# Altium PCB plp-cbot_2a_assm.PcbDoc
Units mm, origin at the board's own origin, x right, y up, seen from the top; angles counter-clockwise.
Board outline 42 x 42 mm, 2 copper layers (Top Layer, Bottom Layer), stack 1.07 mm thick; 52 components, 35 nets, 168 pads, 49 vias.
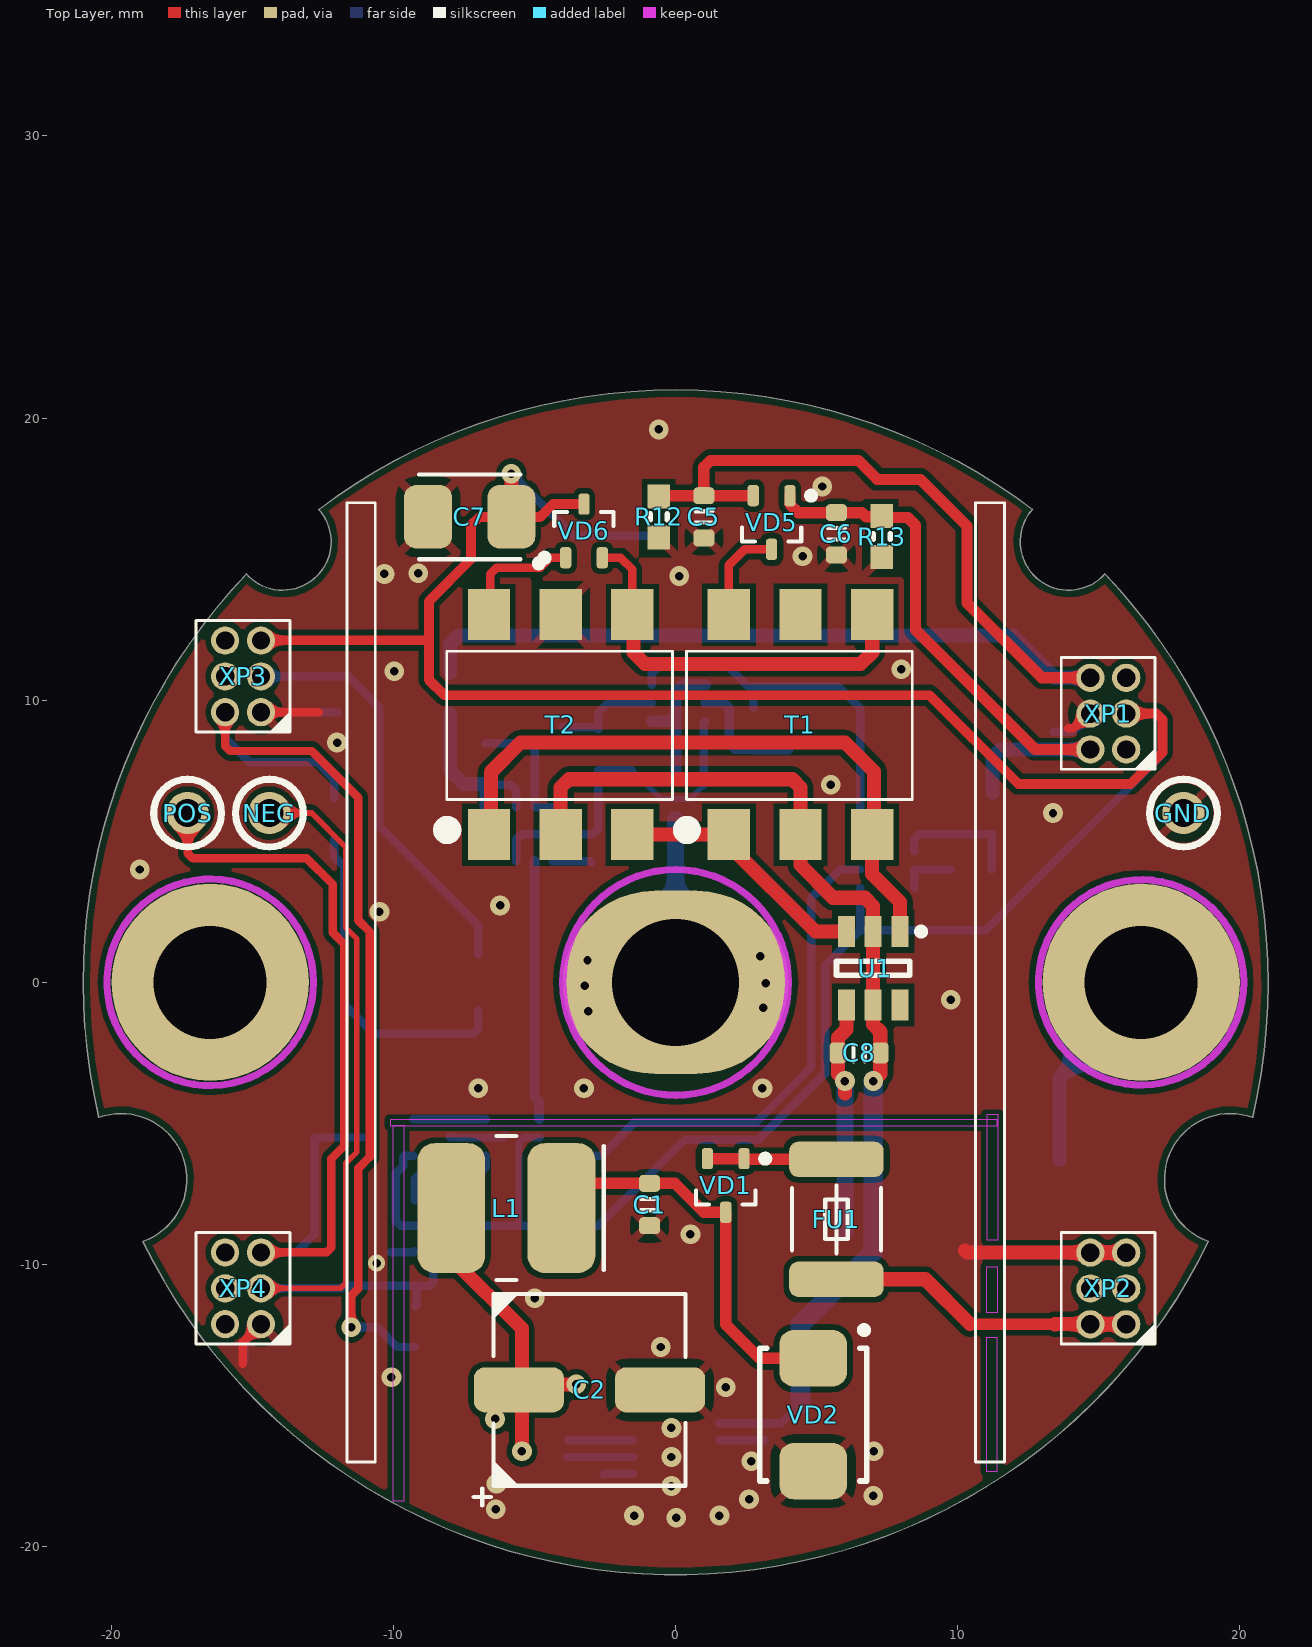
[diagram p0: Top Layer view]
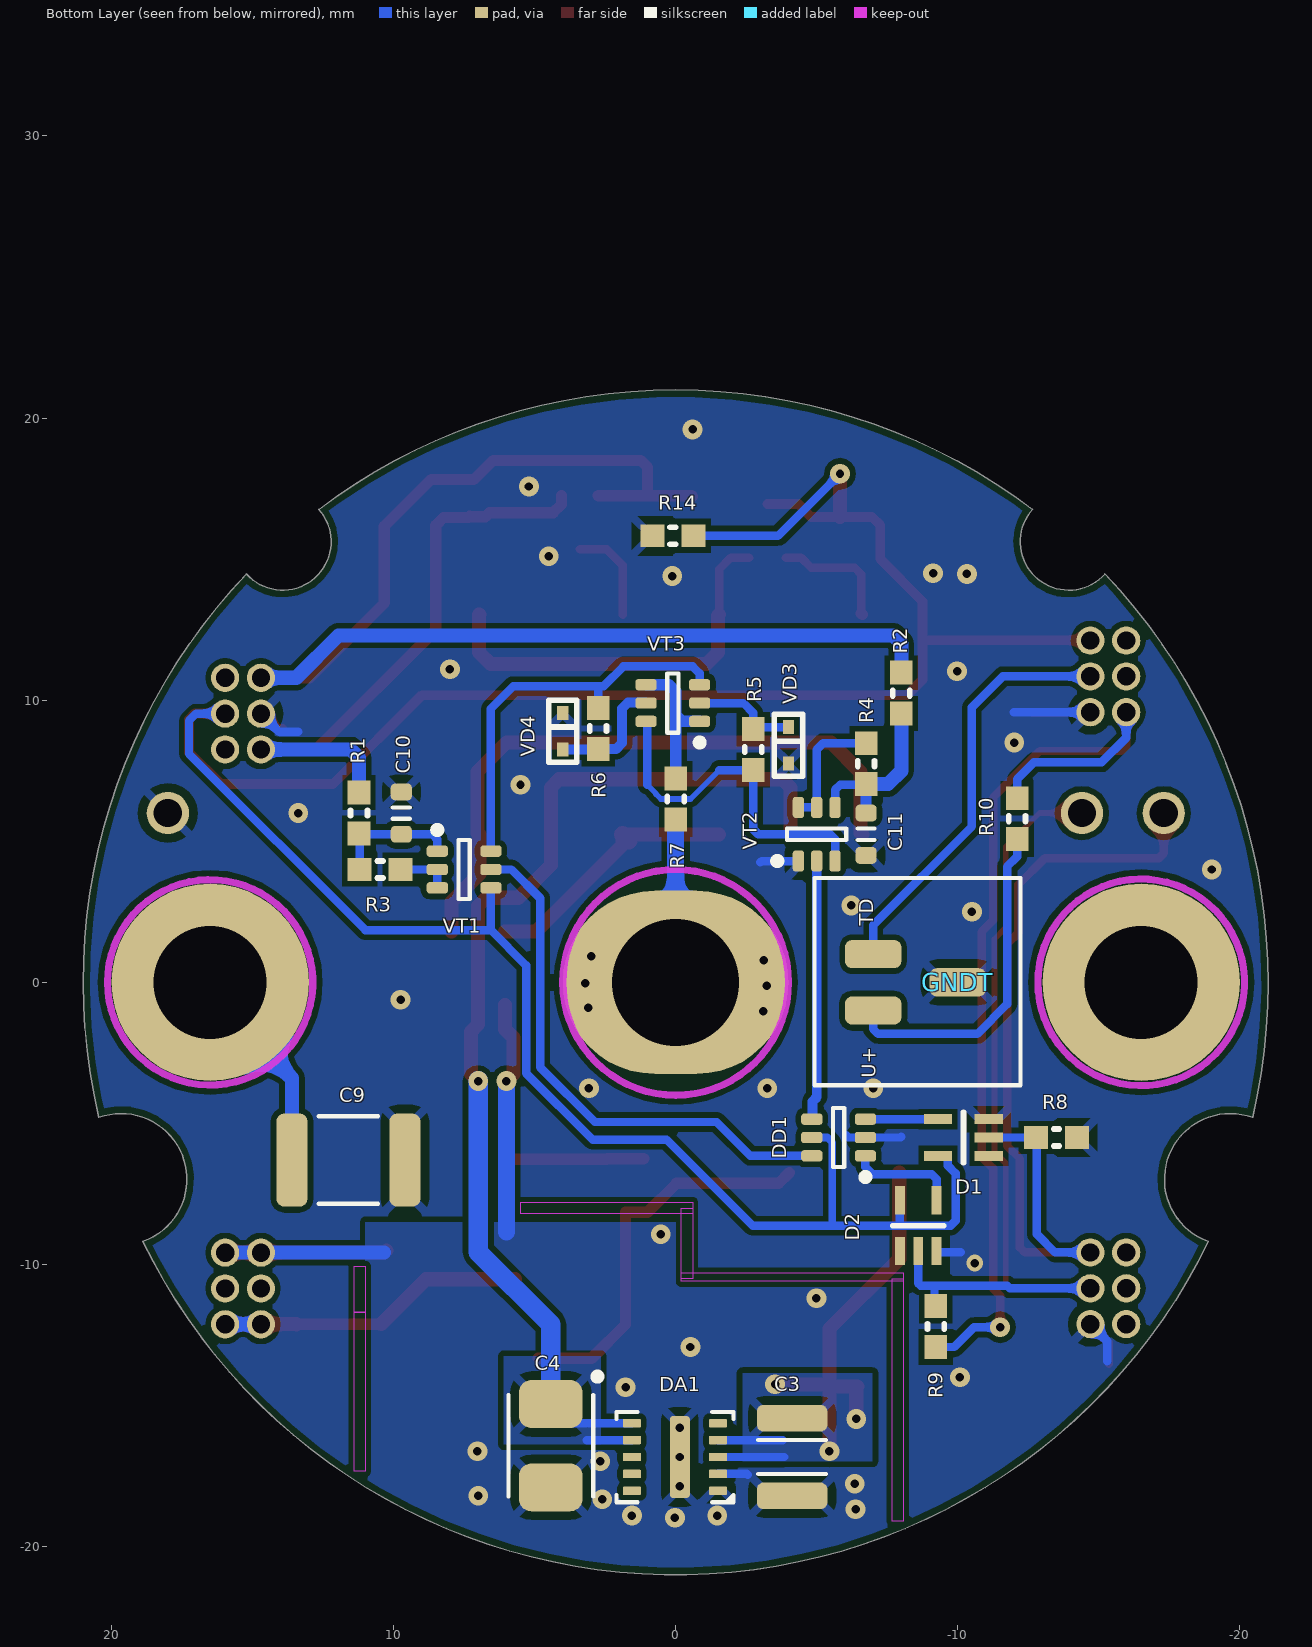
[diagram p1: Bottom Layer view, seen from below]
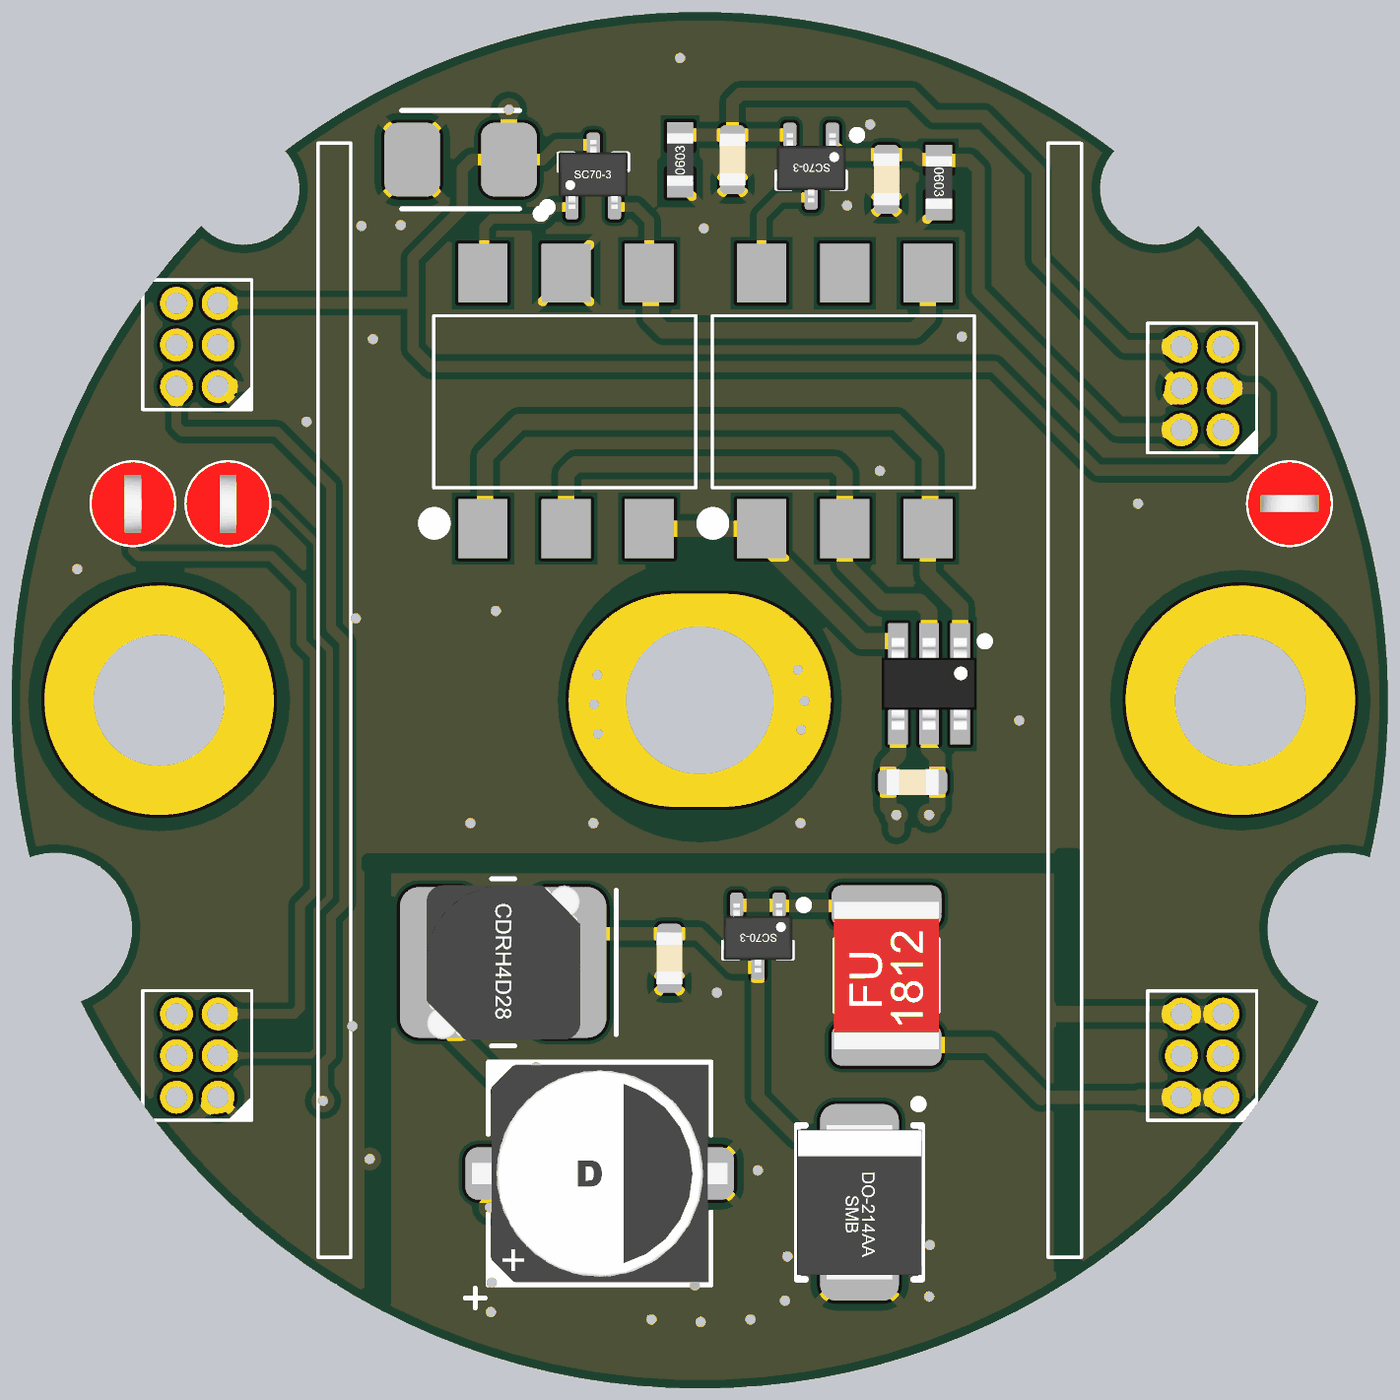
[diagram p2: 3D render of the assembled board from above, using the file's embedded part models]
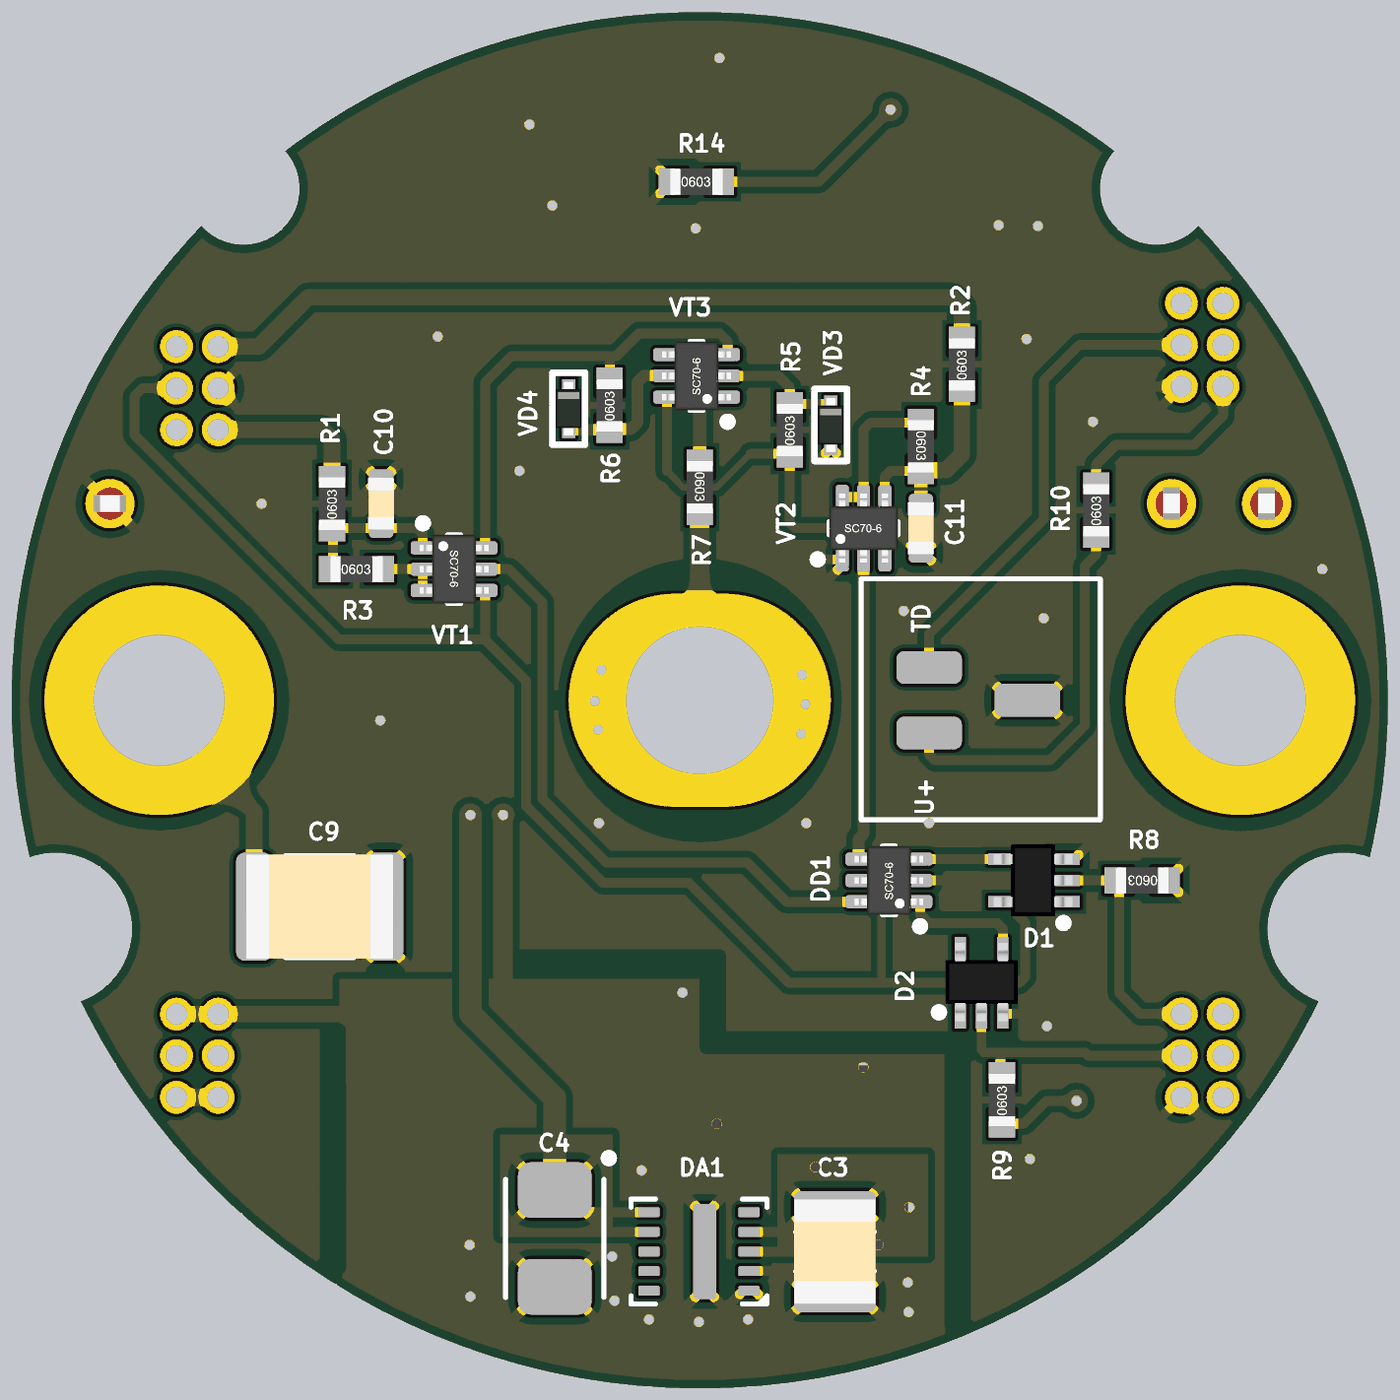
[diagram p3: 3D render of the assembled board from below, using the file's embedded part models]

## Layer stack, top to bottom
Top Solder: solder mask 0.0102, Solder Resist, Dk 3.5
Top Layer: signal copper 0.035
Dielectric1: core 1, FR-4, Dk 4.8
Bottom Layer: signal copper 0.035
Bottom Solder: solder mask 0.0102, Solder Resist, Dk 3.5

## Board outline
-18.871,-9.18 ccw(c-19.659,-6.984) -20.447,-4.788 cw(c0,0) -15.214,14.475 ccw(c-13.932,15.619) -12.649,16.762 -12.65,16.763 cw(c0,0) 12.65,16.763 ccw(c13.932,15.619) 15.204,14.464 15.215,14.474 cw(c0,0) 20.447,-4.788 ccw(c19.659,-6.984) 18.878,-9.183 18.884,-9.186 cw(c0,0)

## Design rules (kind name [scope] priority, off if disabled: settings)
AcuteAngle [All] p1: minimum=4.40000000000000E+0001 checktracksonly=FALSE
BoardOutlineClearance [All] p1: gap=0.254 ignorepadtopadclearanceinfootprint=FALSE except(0: Arc-SplitContinuation Track-SplitContinuation SMDPad-SplitContinuation THPad-SplitContinuation Via-SplitContinuation Fill-SplitContinuation Poly-SplitContinuation Region-SplitContinuation Text-SplitContinuation)
Clearance Clearance_in [(OnLayer('MidLayer1') OR OnLayer('MidLayer2'))] p1: gap=0.2 ignorepadtopadclearanceinfootprint=FALSE except(0: Arc-Hole Track-Hole SMDPad-Hole THPad-Hole Via-Hole Fill-Hole Poly-Hole Region-Hole Text-Hole)
Clearance Clearance_Bound [Not (OnBottomLayer Or OnTopLayer) vs IsBoardCutoutRegion Or IsBoardOutline] p2 off: gap=0.5 ignorepadtopadclearanceinfootprint=FALSE except(0: Arc-Hole Track-Hole SMDPad-Hole THPad-Hole Via-Hole Fill-Hole Poly-Hole Region-Hole Text-Hole)
Clearance Clearance_Poly [InNet('PE')] p3 off: gap=0.5 ignorepadtopadclearanceinfootprint=FALSE except(0: Arc-Hole Track-Hole SMDPad-Hole THPad-Hole Via-Hole Fill-Hole Poly-Hole Region-Hole Text-Hole)
Clearance Clearance_Poly_1 [InNet('-Uп') vs InNet('GND')] p4 off: gap=0.5 ignorepadtopadclearanceinfootprint=FALSE except(0: Arc-Hole Track-Hole SMDPad-Hole THPad-Hole Via-Hole Fill-Hole Poly-Hole Region-Hole Text-Hole)
Clearance Clearance_Poly_2 [InNet('NetC4_1') vs InNet('GND')] p5 off: gap=0.5 ignorepadtopadclearanceinfootprint=FALSE except(0: Arc-Hole Track-Hole SMDPad-Hole THPad-Hole Via-Hole Fill-Hole Poly-Hole Region-Hole Text-Hole)
Clearance Clearance_Poly_3 [InNet('OUT')] p6 off: gap=0.5 ignorepadtopadclearanceinfootprint=FALSE except(0: Arc-Hole Track-Hole SMDPad-Hole THPad-Hole Via-Hole Fill-Hole Poly-Hole Region-Hole Text-Hole)
Clearance Clearance_out [(OnLayer('Bottom Layer') OR OnLayer('Top Layer'))] p7: gap=0.2 ignorepadtopadclearanceinfootprint=FALSE except(0: Arc-Hole Track-Hole SMDPad-Hole THPad-Hole Via-Hole Fill-Hole Poly-Hole Region-Hole Text-Hole)
HoleSize [All] p1: absolutevalues=TRUE maxlimit=2.54 minlimit=0.3 maxpercent=80.000 minpercent=20.000
MinimumAnnularRing [All] p1: minimumring=0.2
MinimumSolderMaskSliver [All] p1: minsoldermaskwidth=0
NetAntennae [All] p1: netantennaetolerance=5
PermittedLayers [All] p1: toplayerpermitted=TRUE bottomlayerpermitted=TRUE
PlaneClearance [All] p1: clearance=0.2
PolygonConnect [All] p1: thpad.connectstyle=Relief thpad.reliefconductorwidth=0.3 thpad.reliefentries=2 thpad.polygonreliefangle="135 Angle" thpad.airgapwidth=0.3 smdpad.connectstyle=Relief smdpad.reliefconductorwidth=0.3 smdpad.reliefentries=4 smdpad.polygonreliefangle="45 Angle" smdpad.airgapwidth=0.3 via.connectstyle=Direct via.reliefconductorwidth=0.3 via.reliefentries=2 via.polygonreliefangle="135 Angle" via.airgapwidth=0.3
PolygonConnect PolygonConnect_1 [InComponent('XS3','XS4','XS5')] p2: thpad.connectstyle=Relief thpad.reliefconductorwidth=0.3 thpad.reliefentries=2 thpad.polygonreliefangle="135 Angle" thpad.airgapwidth=0.3 smdpad.connectstyle=Relief smdpad.reliefconductorwidth=0.3 smdpad.reliefentries=4 smdpad.polygonreliefangle="45 Angle" smdpad.airgapwidth=0.3 via.connectstyle=Direct via.reliefconductorwidth=0.3 via.reliefentries=2 via.polygonreliefangle="135 Angle" via.airgapwidth=0.3
PolygonConnect PolygonConnect_via [isvia] p3: connectstyle=Direct reliefconductorwidth=0.254 reliefentries=4 polygonreliefangle="90 Angle" airgapwidth=0.254
RoutingVias [All] p1: holewidth=0.3 width=0.8 viastyle="Through Hole" minholewidth=0.2 minwidth=0.6 maxholewidth=0.4 maxwidth=1.27
SMDNeckDown [All] p1: percent=100.000
SMDToCorner [All] p1: distance=59055
SMDToPlane [All] p1: distance=0
ShortCircuit [All] p1: allowed=TRUE
SilkToSilkClearance [All] p1: silktosilkclearance=0.15
SilkToSolderMaskClearance SilkscreenOverComponentPads [IsPad] p1: minsilkscreentomaskgap=0.15 clearancetoexposedcopper=TRUE
SolderMaskExpansion [All] p1: expansion=0.1 istentingtop=FALSE
ViasUnderSMD [All] p1: allowed=TRUE
Width [All] p1: maxlimit=3 minlimit=0.2 preferedwidth=0.25 minimp=50.000000 maximp=50.000000 favimp=50.000000
23 further rules are at their usual default settings.

## Components (designator, comment, footprint, x,y, rotation, side; value= is the part's Value field where it differs from the comment)
+U "smd_pin" smd_pin#1 -8.275,-1.7 r180 bottom locked
C1 "4,7uF" CAPC_0603(1608)X080L -0.925,-7.875 r90 top
C2 "47uF" CAPSM_D_M7878X54L -3.054,-14.445 r0 top
C3 "CAPC_1210(3225)X10" CAPC_1210(3225)X10L -4.125,-16.825 r90 bottom value=10mkF
C4 "" CAP_B3528X21N 4.425,-16.425 r270 bottom
C5 "4,7uF" CAPC_0603(1608)X080L 1,16.5 r90 top
C6 "4,7uF" CAPC_0603(1608)X080L 5.7,15.9 r270 top
C7 "100uF" CAP_B3528X21N -7.3,16.5 r180 top
C8 "10uF" CAPC_0603(1608)X080L 6.5,-2.5 r0 top
C9 "0.001uF" CAPC_1812(4532)X16L 11.6,-6.3 r0 bottom
C10 "1uF" CAPC_0603(1608)X080L 9.725,6 r90 bottom
C11 "1uF" CAPC_0603(1608)X080L -6.75,5.25 r90 bottom
D1 "SN74LV1T34DCK" SC70-5 -10.2,-5.5 r0 bottom
D2 "SN74LV1T34DCK" SC70-5 -8.6,-8.625 r90 bottom
DA1 "LMZM23600" MicroSIP 0.025,-16.825 r90 bottom
DD1 "NC7WZ17P6X" SC-70-6 -5.775,-5.5 r90 bottom
FU1 "MF-MSMF" FU4532(1812)X06N 5.7,-8.4 r90 top
GND "Testpoint_HS1mm" TestPoint(1mm_HS) 18.088,5.914 r0 top
GNDT "smd_pin" smd_pin#2 -10,-0.025 r180 bottom locked
L1 "CDRH4D28" CDRH4D28_INDP5050X28N -6,-8 r270 top value=22uH
NEG "Testpoint_HS1mm" TestPoint(1mm_HS) -14.486,5.912 r270 top
POS "Testpoint_HS1mm" TestPoint(1mm_HS) -17.386,5.912 r270 top
R1 "1k" RESC1608(0603)X04L 11.225,6 r90 bottom
R2 "1k" RESC1608(0603)X04L -8,10.25 r90 bottom
R3 "1k" RESC1608(0603)X04L 10.475,4 r180 bottom
R4 "1k" RESC1608(0603)X04L -6.75,7.75 r270 bottom
R5 "1k" RESC1608(0603)X04L -2.75,8.25 r90 bottom
R6 "1k" RESC1608(0603)X04L 2.75,9 r90 bottom
R7 "100" RESC1608(0603)X04L 0,6.5 r270 bottom value=1k
R8 "10k" RESC1608(0603)X04L -13.5,-5.5 r0 bottom
R9 "10k" RESC1608(0603)X04L -9.225,-12.2 r90 bottom
R10 "R0603L" RESC1608(0603)X04L -12.1,5.8 r90 bottom value=100
R12 "20K" RESC1608(0603)X04L -0.6,16.5 r90 top
R13 "20K" RESC1608(0603)X04L 7.3,15.8 r270 top
R14 "1K" RESC1608(0603)X04L 0.1,15.825 r180 bottom
T1 "B82805A" B82805A 7.2,5.2 r90 top
T2 "B82805A" B82805A -1.3,5.2 r90 top
TD "smd_pin" smd_pin#3 -8.575,2.625 r180 bottom locked
U1 "SN6505B" SOT23-6 7,0.5 r270 top
VD1 "BAV70W" SC-70 1.775,-7.2 r180 top
VD2 "SMBJ33A" SMB 4.875,-15.325 r270 top
VD3 "BZX585" "DIODE: SOD523" -4,7.75 r90 bottom
VD4 "BZX585" "DIODE: SOD523" 4,8.25 r90 bottom
VD5 "BAT54SW" SC-70 3.4,16.3 r180 top
VD6 "BAT54CW" SC-70 -3.25,16 r0 top
VT1 "NX3008CBKS" SC-70-6 7.5,4 r270 bottom
VT2 "NX3008CBKS" SC-70-6 -5,5.25 r180 bottom
VT3 "NX3008CBKS" SC-70-6 0.1,9.9 r90 bottom
XP1 "2199R05-06G-301523" "CON: PLL-6(2x3R1.27female)" 17.012,7.501 r90 top locked
XP2 "2199R05-06G-301523" "CON: PLL-6(2x3R1.27female)" 17.012,-12.874 r90 top locked
XP3 "2199R05-06G-301523" "CON: PLL-6(2x3R1.27female)" -13.658,8.821 r90 top locked
XP4 "2199R05-06G-301523" "CON: PLL-6(2x3R1.27female)" -13.658,-12.869 r90 top locked

## Footprints (in the part's own frame and the unit in brackets; to place one, negate y for a bottom-side part, rotate by r counter-clockwise, add the part's x,y. Pads: shape width x height; smd on the part's side, far side on the other; paste and mask are expansions set on the pad)
B82805A [mm]
  rect 1.8x1.5 smd: 1(0.036,5.317) 2(0.036,2.777) 3(0.036,0.237) 4(7.836,0.237) 5(7.836,2.777) 6(7.836,5.317)
  silkscreen extent -0.05,-1.18 6.54,7.05, body extent 1.29,-1.18 6.54,6.82, height 5.7
CAP_B3528X21N [mm] "Molded Capacitor, 2-Leads, Body 3,5x2,8mm, IPC Medium Density"
  rrect50% 1.7x2.25 smd: 1(-1.475,0) 2(1.475,0)
  silkscreen extent -2.57,-1.5 1.8,1.77, body extent -1.8,-1.45 1.8,1.45, height 1.9
CAPC_0603(1608)X080L [mm] "Chip Capacitor, 2-Leads, Body 1,6x0,8mm, IPC High Density"
  rrect50% 0.6x0.75 smd: 1(-0.75,0) 2(0.75,0)
  silkscreen extent -0.2,-0.3 0.2,0.3, body extent -0.8,-0.4 0.8,0.4, height 0.8
CAPC_1210(3225)X10L [mm] "Chip Capacitor, 2-Leads, Body 3,2x2,5mm, IPC High Density"
  rrect50% 0.95x2.5 smd: 1(-1.375,0) 2(1.375,0)
  silkscreen extent -0.6,-1.2 0.6,1.2, body extent -1.6,-1.25 1.6,1.25, height 0.94
CAPC_1812(4532)X16L [mm] "Chip Capacitor, 2-Leads, Body 4,5x3,2mm, IPC High Density"
  rrect50% 1.1x3.3 smd: 1(-2,0) 2(2,0)
  silkscreen extent -1.05,-1.55 1.05,1.55, body extent -2.25,-1.6 2.25,1.6, height 1.52
CAPSM_D_M7878X54L [mm] "Molded Capacitor, 2-Leads, Body 7,8x7,8mm, IPC High Density"
  rrect50% 3.2x1.6 smd: 1(-2.5,0) 2(2.5,0)
  silkscreen extent -4.1,-4.1 3.4,3.4, body extent -3.9,-3.3 3.9,3.3, height 5.57
CDRH4D28_INDP5050X28N [mm] "Precision Wire Wound Inductor, 2-Leads, Body 5,0x5,0mm, IPC Medium Density"
  rrect50% 4.6x2.4 smd: 1(0,1.95) 2(0,-1.95)
  silkscreen extent -2.55,-0.35 2.55,3.45, body extent -2.35,-2.35 2.35,2.37, height 2.8
"CON: PLL-6(2x3R1.27female)" [mm]
  round 1 hole 0.65: 1(0.754,1.042) 2(0.754,2.312) 3(2.024,1.042) 4(2.024,2.312) 5(3.294,1.042) 6(3.294,2.312)
  silkscreen extent 0.05,0.02 4.01,3.34
"DIODE: SOD523" [mm]
  rect 0.5x0.4 smd: 1(0,0) 2(1.3,0)
  silkscreen extent -0.45,-0.5 1.75,0.5, body extent -0.17,-0.4 1.48,0.4, height 0.65
FU4532(1812)X06N [mm] "Chip Resistor, 2-Leads, Body 4,5x3,2mm, IPC Medium Density"
  rrect50% 1.25x3.35 smd: 1(-2.125,0) 2(2.125,0)
  silkscreen extent -1.2,-1.58 1.2,1.58, body extent -2.25,-1.6 2.25,1.6, height 0.6
MicroSIP [mm]
  rrect30% 0.3x0.65 smd: 1(-1.2,-1.525) 2(-0.6,-1.525) 3(0,-1.525) 4(0.6,-1.525) 5(1.2,-1.525) 6(1.2,1.525) 7(0.6,1.525) 8(0,1.525) 9(-0.6,1.525) 10(-1.2,1.525)
  rrect30% 2.9x0.7 smd: 11(0,-0.175)
  silkscreen extent -1.6,-2.07 1.6,2.08, body extent -1.5,-1.9 1.5,1.9, height 1.6
RESC1608(0603)X04L [mm] "Chip Resistor, 2-Leads, Body 1,6x0,8mm, IPC High Density"
  rect 0.85x0.8 smd: 1(-0.725,0) 2(0.725,0)
  silkscreen extent -0.1,-0.3 0.1,0.3, body extent -0.8,-0.4 0.8,0.4, height 0.45
SC70-5 [mm] "pitch 0.95 mm"
  rect 1x0.35 smd: 1(-0.9,0.65) 2(-0.9,0) 3(-0.9,-0.65) 4(0.9,-0.65) 5(0.9,0.65)
  round 0.5 on Bottom Overlay: ""(-0.9,1.3)
  round 0.5 on Mech15: ""(-0.775,0.725)
  silkscreen extent 0,-0.9 0,0.9, body extent -1.18,-1.1 1.22,1.1, height 1.09
SC-70 [mm] "SC-70, 3-Leads, Body 2,1x1,4mm (max), Pitch 0,65mm, IPC High Density"
  rrect50% 0.4x0.75 smd: 1(-0.65,-0.95) 2(0.65,-0.95) 3(0,0.95)
  silkscreen extent -1.53,-1.07 1.05,0.67, body extent -1.05,-1 1.05,1.1, height 1.1
SC-70-6 [mm] "SC-70, 6-Leads, Body 2,1x1,4mm (max), Pitch 0,65mm, IPC High Density"
  rrect50% 0.4x0.75 smd: 1(-0.65,-0.95) 2(0,-0.95) 3(0.65,-0.95) 4(0.65,0.95) 5(0,0.95) 6(-0.65,0.95)
  silkscreen extent -1.52,-1.07 1.05,0.2, body extent -1.05,-1.05 1.05,1.05, height 1.1
SMB [mm] "Molded Diode, 2-Leads, Body 4,4x3,5mm, IPC Medium Density"
  rrect50% 2x2.4 smd: 1(-2,0) 2(2,0)
  silkscreen extent -3.12,-1.9 2.35,1.92, body extent -2.35,-1.9 2.35,1.9, height 2.32
smd_pin#1 [mm]
  rrect50% 2x1 smd: 1(-1.275,0.7)
smd_pin#2 [mm]
  rrect50% 2x1 smd: 1(0,0.025)
smd_pin#3 [mm]
  rrect50% 2x1 smd: 1(-1.575,-1.625)
SOT23-6 [mm] "pitch 0.95 mm"
  rect 1.1x0.6 smd: 1(-1.3,0.95) 2(-1.3,0) 3(-1.3,-0.95) 4(1.3,-0.95) 5(1.3,0) 6(1.3,0.95)
  round 0.5 on Mech13: ""(-1,1.1)
  silkscreen extent -1.42,-1.3 0.25,1.83, body extent -1.4,-1.45 1.4,1.45, height 1.45
TestPoint(1mm_HS) [mm]
  round 1.5 hole 1: 1(-0.088,0.086)
  silkscreen extent -1.29,-1.11 1.11,1.29, body extent -1.36,-1.18 1.18,1.36, height 4.57

## Part data
C1: library part "Capacitor Ceramic", "Конденсатор", Case=0603, Manufacturer=Murata, Rated DC Voltage=50V, ReplacementPart1Manufacturer=TDK, ReplacementPart2Manufacturer="Taiyo Yuden", Temperature Range="-55 to +125°C", Tolerance=±10%, ComponentLink1Description="Global Data", ComponentLink1URL=http://www.murata.com/products/capacitor/tech_data/index.html, ComponentLink2Description="Part Data Sheet", ComponentLink3Description="Replacement Data Sheet", ComponentLink4Description="Replacement 2 Data Sheet", ESR="* mOhm", OrderCode="0603 - 0,022мкФ ±10% - 50В - X7R", TC Code=X7R
C2: library part "SMD 5.3XD6.3 ALUM 22uFx50V", "Конденсатор", CaseCode=D, CaseSize=D6.3X5.4, Manufacturer=Panasonic, Rated DC Voltage="50 V", Tolerance=±20%, OrderCode="EEE1HA220WP - 22 мкФ - 50 В", Rated T="-40 to +85°C", Series=SV
C3: "Capacitor Chip"
C4: library part "Capacitor Polarized", "Конденсатор", Manufacturer=Murata, ComponentLink1Description="Global Data", ComponentLink2Description="Part Data Sheet", ComponentLink3Description="Replacement Data Sheet", ComponentLink4Description="Replacement 2 Data Sheet", TC Code=X7R
C5 C6: library part "Capacitor Ceramic", "Конденсатор", Case=0603, Manufacturer=Murata, Rated DC Voltage=25V, ReplacementPart1Manufacturer=TDK, ReplacementPart2Manufacturer="Taiyo Yuden", Temperature Range="-55 to +125°C", Tolerance=±10%, ComponentLink1Description="Global Data", ComponentLink1URL=http://www.murata.com/products/capacitor/tech_data/index.html, ComponentLink2Description="Part Data Sheet", ComponentLink3Description="Replacement Data Sheet", ComponentLink4Description="Replacement 2 Data Sheet", ESR="* mOhm", OrderCode="0603 - 0,022мкФ ±10% - 50В - X7R", TC Code=X7R
C7: library part "Capacitor Polarized", "Конденсатор", Manufacturer=Murata, Rated DC Voltage=10V, ComponentLink1Description="Global Data", ComponentLink2Description="Part Data Sheet", ComponentLink3Description="Replacement Data Sheet", ComponentLink4Description="Replacement 2 Data Sheet", TC Code=X7R
C8: library part "Capacitor Ceramic", "Конденсатор", Case=0603, Manufacturer=Murata, ReplacementPart1Manufacturer=TDK, ReplacementPart2Manufacturer="Taiyo Yuden", Temperature Range="-55 to +125°C", Tolerance=±10%, ComponentLink1Description="Global Data", ComponentLink1URL=http://www.murata.com/products/capacitor/tech_data/index.html, ComponentLink2Description="Part Data Sheet", ComponentLink3Description="Replacement Data Sheet", ComponentLink4Description="Replacement 2 Data Sheet", ESR="* mOhm", OrderCode="0603 - 0,022мкФ ±10% - 50В - X7R", TC Code=X7R
C9: library part "Capacitor Ceramic", "Конденсатор", Case=0603, Manufacturer=Murata, PartNumber="0603 - 0,1 мкФ ± 10 % - 50 В - X7R", Rated DC Voltage=3000V, ReplacementPart1Manufacturer=TDK, ReplacementPart2Manufacturer="Taiyo Yuden", Temperature Range="-55 to +125°C", Tolerance=±10%, ComponentLink1Description="Global Data", ComponentLink1URL=http://www.murata.com/products/capacitor/tech_data/index.html, ComponentLink2Description="Part Data Sheet", ComponentLink3Description="Replacement Data Sheet", ComponentLink4Description="Replacement 2 Data Sheet", TC Code=X7R
C10 C11: library part "0603 - X7R - 16V - 1uF", "Конденсатор", Case=0603, Manufacturer=Murata, PartNumber="GRM188R71C105KA12D - 0603 - 1 мкФ ± 10 % - 16 В - X7R", Rated DC Voltage=50V, ReplacementPart1Manufacturer=TDK, ReplacementPart1PartNumber=C1608X7R1C105K, ReplacementPart2Manufacturer="Taiyo Yuden", Temperature Range="-55 to +125°C", Tolerance=±10%, ComponentLink1Description="Global Data", ComponentLink1URL=http://www.murata.com/products/capacitor/tech_data/index.html, ComponentLink2Description="Part Data Sheet", ComponentLink3Description="Replacement Data Sheet", ComponentLink4Description="Replacement 2 Data Sheet", TC Code=X7R
D1 D2: "Single Buffer", ComponentLink1Description=Datasheet, ComponentLink1URL=https://www.ti.com/lit/ds/symlink/sn74lv1t34.pdf?ts=1607003293244&ref_url=https%253A%252F%252Fwww.ti.com%252Fproduct%252FSN74LV1T34
DA1: "Микросхема", Manufacturer="Texas Instruments", ComponentLink1Description="Data Sheet (offline)", ComponentLink1URL="\\axirion\KB\PDF\Стабилизаторы напряжения импульсные\tps63001.pdf", ComponentLink2Description="Replacement 1 Data Sheet", ComponentLink3Description="Replacement 2 Data Sheet", PartNumber=LMZM23600, TopMarking=BPT
DD1: "UHS Dual Buffer with Schmitt Trigger Inputs"
FU1: "Самовостанавливающийся предохранитель", Manufacturer=Bourns, PartNumber="MF-MSMF 010/60-2", ReplacementPart1Manufacturer=Tyco-Electronics, ReplacementPart1PartNumber=MINISMDC010F-2, ComponentLink1Description="Data Sheet", ComponentLink1URL=http://www.bourns.com/data/global/pdfs/mfmsmf.pdf, ComponentLink2Description="Replacement 1 Data Sheet", ComponentLink2URL=http://www.tycoelectronics.com/catalog/bin/TE.Connect?S=23159&M=PPROP&P=152415,173314&BML=10576,17593&LG=1&PG=1&IDS=489613,489486&N=1
R1 R2 R3 R4 R5 R6 R7 R8 R9 R12 R13 R14: library part R0603L, "Резистор", Case=0603, Manufacturer=Bourns, Max Rated DC Voltage="100 В", PartNumber="0603 - {Value} Ом ± 1 %", Power="1/10 Вт", Rated DC Voltage="50 В", Temperature Range="-55 to +125°C", Tolerance="±1 %", ComponentLink1Description="Data Sheet", ComponentLink1URL=http://smd.ru/files/upload/1207/ru/chip-resis.pdf, ComponentLink2Description="Specific Res Only", ComponentLink3Description="Replacement Data Sheet", ComponentLink4Description="Replacement 2 Data Sheet", Rated T="-55 °C to +125 °C", TKR="±100 ppm"
R10: "Резистор", Case=0603, Manufacturer=Bourns, Max Rated DC Voltage="100 В", Power="1/10 Вт", Rated DC Voltage="50 В", Resistance Code="0603 {Value} Ом ±1 %", Temperature Range="-55 to +125°C", Tolerance="±1 %", ComponentLink1Description="Data Sheet", ComponentLink1URL=http://smd.ru/files/upload/1207/ru/chip-resis.pdf, ComponentLink2Description="Specific Res Only", ComponentLink3Description="Replacement Data Sheet", ComponentLink4Description="Replacement 2 Data Sheet", Rated T="-55 °C to +125 °C", TKR="±100 ppm"
T1 T2: "SMT Push-Pull Transformers", ComponentLink1Description=Datasheet, ComponentLink1URL=https://www.tdk-electronics.tdk.com/inf/30/ds/b82805a.pdf
U1: library part SN6505A, "Low-Noise 1-A Transformer Drivers for Isolated Power Supplies", ComponentLink1Description=Datasheet, ComponentLink1URL=https://www.ti.com/lit/ds/symlink/sn6505a.pdf?ts=1606984863638&ref_url=https%253A%252F%252Fwww.google.com%252F
VD1: "Сборка диодная", Manufacturer=NXP, Package=SC-70, ComponentLink1Description=DataSheet, ComponentLink2Description=Replacement1DataSheet, ComponentLink3Description=Replacement2DataSheet, PartNumber=BAV70W
VD2: "TVS Диод", Manufacturer="ST Microelectronics", ReplacementPart1Manufacturer=NXP, ReplacementPart1PartNumber=PTVS33VP1UP, ReplacementPart2Manufacturer=VISHAY, StandOffVoltage=33V, ComponentLink1Description="Data Sheet", ComponentLink1URL=http://www.st.com/internet/com/TECHNICAL_RESOURCES/TECHNICAL_LITERATURE/DATASHEET/CD00001366.pdf, ComponentLink2Description="Replacement 1 Data Sheet", ComponentLink2URL=http://www.nxp.com/documents/data_sheet/PTVSXP1UP_SER.pdf, ComponentLink3Description="Replacement 2 Data Sheet", PartNumber=SMBJ33A, ReplacementPart2TopMarking=KC
VD3 VD4: "Voltage regulator diodes", ComponentLink1Description=Datasheet, ComponentLink1URL=https://assets.nexperia.com/documents/data-sheet/BZX585_SERIES.pdf
VD5: "Сборка диодная", Manufacturer=NXP, Package=SC-70, ReplacementPart1Manufacturer="ON Semiconductor", ReplacementPart1PartNumber=BAT54SWT1G, ReplacementPart2Manufacturer=Infineon, ReplacementPart2PartNumber=BAT54-04W, ComponentLink1Description=DataSheet, ComponentLink1URL=http://www.nxp.com/documents/data_sheet/BAT54W.pdf, ComponentLink2Description=Replacement1DataSheet, ComponentLink2URL=http://www.onsemi.com/pub_link/Collateral/BAT54SWT1-D.PDF, ComponentLink3Description=Replacement2DataSheet, ComponentLink3URL=http://www.infineon.com/dgdl/bat54series.pdf?folderId=db3a30431400ef68011425f1ca2505e3&fileId=db3a304314dca3890115190b74210ea6, PartNumber=BAT54SW, ReplacementPart1TopMarking=B8*, ReplacementPart2TopMarking=TS, TopMarking=44
VD6: "Сборка диодная", Manufacturer=NXP, Package=SC-70, ReplacementPart1Manufacturer="ON Semiconductor", ReplacementPart1PartNumber=BAT54CWT1G, ReplacementPart2Manufacturer=Infineon, ReplacementPart2PartNumber=BAT54-05W, ComponentLink1Description=DataSheet, ComponentLink1URL=http://www.nxp.com/documents/data_sheet/BAT54W.pdf, ComponentLink2Description=Replacement1DataSheet, ComponentLink2URL=http://www.onsemi.com/pub_link/Collateral/BAT54CWT1-D.PDF, ComponentLink3Description=Replacement2DataSheet, ComponentLink3URL=http://www.infineon.com/dgdl/bat54series.pdf?folderId=db3a30431400ef68011425f1ca2505e3&fileId=db3a304314dca3890115190b74210ea6, PartNumber=BAT54CW, ReplacementPart1TopMarking=5C*, ReplacementPart2TopMarking=TC, TopMarking=43
VT1 VT2 VT3: "Сборка транзисторная", Manufacturer="Fairchild Semiconductor", PartNumber=BSS84AKS, ReplacementPart1Manufacturer="ON Semiconductor", ComponentLink1Description="Data Sheet", ComponentLink2Description="Replacement 1 Data Sheet", ReplacementPart1TopMarking=TK, TopMarking=.16
XP1 XP2 XP3 XP4: library part 2199R05-06G-301523In, "Step 1.27"

## Free pads (board coordinates)
  round 7 hole 4: 0(-16.5,0) 0(16.5,0)
  oval 8x6.5 hole 4.5: 0(0,0)

## Via types
v1: diameter 0.7, hole 0.3, Top Layer to Bottom Layer, tented both sides, 45 vias
v2: diameter 0.7, hole 0.3, Top Layer to Bottom Layer, tented top, 3 vias
v3: diameter 0.6, hole 0.3, Top Layer to Bottom Layer, tented both sides, 1 vias

## Nets (pads, with @x,y where several pads share a name; then routed paths per layer and width w, separated by ;. In a path a pad name is that pad's centre, name@x,y a point inside that pad or via, vN(x,y) a via of type N, cw(c..) or ccw(c..) an arc to the next point about the centre after c; other vN are vias at no path point)
5V_LMZ: C4.1 C8.2 DA1.6 DA1.7 T1.2 T2.2 U1.2 U1.5 | length 40.2
  Top Layer w0.5: T2.2 -4.077,6.907 -3.784,7.2 4.13,7.2 4.423,6.907 4.423,4.153 5.577,3 6.707,3 7,2.707 U1.2 U1.5 7,-1.5 7.25,-1.75 C8.2@7.25,-2.625 ; v1(7,-3.5) 7.25,-3.25 C8.2@7.25,-2.625 ; C8.2 C8.2@7.25,-2.625
  Bottom Layer w0.3: DA1.7 3.15,-16.225 ; DA1.6 3.75,-15.625 C4.1
  Bottom Layer w0.7: C4.1 4.425,-12.132 7,-9.557 v1(7,-3.5)
+3.3: R9.1 R10.2 XP3.2 | length 34.5
  Top Layer w0.3: XP3.2 -15.97,8.376 -15.795,8.2 -12.9,8.2 -11.25,6.55 -11.25,2.199 -10.85,1.799 -10.85,-6.104 -10.85,-6.196 -11.25,-6.596 -11.25,-10.856 -11.5,-11.106 v1(-11.5,-12.225)
  Bottom Layer w0.3: XP3.2 -15.97,8.67 -15.1,7.8 -12.7,7.8 -12.1,7.2 R10.2 ; v1(-11.5,-12.225) -10.575,-12.225 -9.875,-12.925 R9.1
+5V: C7.1 D1.5 D2.5 DD1.5 R14.2 VD6.3 VT1.4 XP1.3 XP3.5 | length 102.7
  Top Layer w0.35: XP3.5 -14.69,12.125 -8.75,12.125 ; VD6.3 -4.35,16.95 -4.8,16.5 C7.1 -6.957,16.5 -7.25,16.207 -7.25,15 -8.75,13.5 -8.75,12.125 ; XP1.3@15.979,9.525 17.045,9.525 17.25,9.32 17.25,8.15 16.125,7.025 12.15,7.025 9,10.175 -8.2,10.175 -8.75,10.725 -8.75,12.125
  Top Layer w0.5: C7.1 v1(-5.825,18.025)
  Bottom Layer w0.25: -5.55,-8.625 -5.55,-5.679 -5.371,-5.5
  Bottom Layer w0.3: D1.5 -9.625,-6.15 -9.65,-6.175 -9.65,-6.5 -9.924,-6.774 -9.924,-8.449 -9.749,-8.625 -7.949,-8.625 ; D2.5 -7.95,-8.624 -7.949,-8.625 ; v1(-5.825,18.025) -3.625,15.825 R14.2@-0.575,15.825 ; -5.371,-5.5 DD1.5 ; VT1.4 6.55,1.85 ; XP1.3@15.649,9.525 XP1.3@15.825,9.349 ; XP1.3@15.979,9.525 17,9.525 17.25,9.275 17.25,8.1 11,1.85 6.55,1.85 ; -7.949,-8.625 -5.55,-8.625 -2.725,-8.625 0.325,-5.575 2.947,-5.575 5.3,-3.222 5.3,0.6 6.55,1.85
+15: C5.2 R2.2 R12.2 VD5.2 XP1.6 | length 47.4
  Top Layer w0.4: R12.2 -0.575,17.25 C5.2 ; VD5.2 C5.2 ; XP1.6@14.709,10.795 13.45,10.795 12.98,10.795 10.325,13.45 10.325,16.175 8.675,17.825 7.15,17.825 6.475,18.5 1.234,18.5 1,18.266 C5.2
  Bottom Layer w0.5: R2.2 -8,12 -7.706,12.294 11.951,12.294 13.45,10.795 XP1.6@14.709,10.795
+Uп: FU1.1 XP2.1 XP2.2 | length 12.2
  Top Layer w0.4: 10.437,-12.115 13.425,-12.115
  Top Layer w0.5: FU1.1 8.846,-10.525 10.437,-12.115 ; 13.45,-12.12 13.454,-12.115 14.715,-12.115 XP2.2@14.72,-12.12 ; XP2.2@14.709,-12.12 XP2.2@14.72,-12.12 ; XP2.1@15.979,-12.12 XP2.2@14.72,-12.12
  Bottom Layer w0.5: XP2.2@14.709,-12.12 XP2.1@15.979,-12.12
-15: C6.1 R1.2 R13.1 VD5.1 XP1.2 | length 21.6
  Top Layer w0.4: VD5.1 4.05,16.943 4.343,16.65 C6.1 6.6,16.65 6.75,16.5 7.275,16.5 R13.1 7.35,16.475 8.225,16.475 8.5,16.2 8.5,12.5 12.745,8.255 XP1.2@14.709,8.255
  Bottom Layer w0.5: R1.2 11.225,7.962 11.518,8.255 XP1.2@14.709,8.255
-Uп: C1.1 C2.2 C3.1 C4.2 C8.1 DA1.1 DA1.2 DA1.11 U1.4 VD2.2 XP2.5 XP2.6 | length 21.2
  Top Layer w0.5: 6,-3.946 v1(6,-3.5) 5.75,-3.25 C8.1 5.75,-1.963 6.05,-1.663 U1.4 ; 10.25,-9.5 10.33,-9.58 14.709,-9.58 XP2.5@15.979,-9.58
  Bottom Layer w0.3: -2.55,-17.45 -2.525,-17.425 DA1.2
  Bottom Layer w0.5: 10.341,-9.58 XP2.5@15.979,-9.58
  Bottom Layer w0.6: 6,-8.855 v1(6,-3.5)
  other v1: 0.025,-18.975 -1.475,-18.9 1.55,-18.9 -6.375,-18.675 2.6,-18.325 7,-18.2 -6.35,-17.775 2.675,-16.975 7.025,-16.625 1.775,-14.35 -0.525,-12.925 -4.991,-11.2 0.525,-8.925
  other v2: -0.15,-17.855 -0.15,-16.825 -0.15,-15.795
D1: T1.3 T2.1 U1.1 | length 22.8
  Top Layer w0.5: T2.1 -6.553,5.299 -6.553,7.447 -5.5,8.5 6,8.5 7.027,7.473 7.027,5.299 T1.3 6.963,3.837 7.95,2.85 U1.1
D2: T1.1 T2.3 U1.3 | length 9.6
  Top Layer w0.5: T2.3 T1.1 1.883,4.867 4.95,1.8 U1.3
  Top Layer w0.6: T1.1@1.648,5 T1.1
GND: C5.1 C6.2 C7.2 C9.1 C10.2 C11.1 D1.3 D2.3 DD1.2 GND.1 GNDT.1 R8.1 R12.1 R13.2 R14.1 T2.5 VD3.1 VD4.2 VT2.1 XP1.4 XP3.1 XP4.1 | length 14.9
  Top Layer w0.3: -15.35,-13.525 -15.35,-12.765 XP4.1 ; XP3.1 -12.643,9.575 ; 13.92,9 14.095,9 14.62,9.525 XP1.4 XP1.4@14.709,9.525
  Bottom Layer w0.3: -15.3,-13.425 -15.3,-12.715 XP4.1 ; XP3.1 -11.981,9.575 ; -10.1,-9.575 -9.3,-9.575 D2.3 ; -8,-5.475 -7.975,-5.5 DD1.2 -6.125,-5.5 -6.05,-5.425 ; VT2.1 -3.05,4.3 -3,4.25 ; 13.375,8.875 14.059,8.875 XP1.4@14.709,9.525
  other v1: -10.075,-14 -7,-3.75 -3.25,-3.75 3.075,-3.75 9.75,-0.615 -10.5,2.5 -6.225,2.725 -19,4 13.375,6 5.5,7 -12,8.5 -9.975,11.025 8,11.1 0.125,14.4 -10.325,14.475 -9.125,14.5 4.5,15.1 5.2,17.575 -0.6,19.6
  other v3: -10.6,-9.95
Net+U_1: +U.1 R10.1 | length 11.9
  Bottom Layer w0.3: R10.1 -12.1,4.45 -11.75,4.1 -11.75,-0.771 -10.695,-1.826 -7.176,-1.826 -7,-1.65 +U.1
NetC1_2: C1.2 L1.1 VD1.3 VD2.1 | length 14
  Top Layer w0.4: L1.1@-4.025,-6.75 -3.65,-7.125 C1.2 -0.025,-7.125 1,-8.15 VD1.3 1.775,-12.125 2.975,-13.325 VD2.1
NetC2_1: C2.1 C3.2 DA1.3 DA1.4 L1.2 | length 19.6
  Top Layer w0.5: L1.2@-7.925,-6.75 -7.925,-9.8 -5.45,-12.275 C2.1@-5.45,-14.25 ; C2.1@-6.45,-14.325 C2.1@-6.4,-14.325 ; v1(-6.4,-15.475) C2.1@-6.4,-14.325 ; v1(-5.45,-16.625) C2.1@-5.45,-14.325 ; v1(-3.525,-14.25) C2.1@-5.45,-14.25 ; C2.1@-6.4,-14.325 C2.1@-5.45,-14.325 ; C2.1@-5.45,-14.325 C2.1@-5.45,-14.25
  Bottom Layer w0.3: -3.85,-16.825 DA1.3 ; -3.8,-16.225 DA1.4
NetC10_1: C10.1 R1.1 R3.1 VT1.1 | length 4.5
  Bottom Layer w0.3: VT1.1 8.45,5.074 8.626,5.25 C10.1 R1.1@11.2,5.25 ; R3.1 R1.1@11.2,5.25 ; R1.1 R1.1@11.2,5.25
NetC11_2: C11.2 R2.1 R4.2 VT2.4 | length 6.3
  Bottom Layer w0.3: R4.2 -6.725,7 -5.826,7 -5.65,6.824 VT2.4
  Bottom Layer w0.4: C11.2 R4.2
  Bottom Layer w0.5: R2.1 -8,7.5 -7.525,7.025 R4.2
NetD1_4: D1.4 DD1.3 | length 2.6
  Bottom Layer w0.3: D1.4 DD1.3
NetD2_4: D2.4 DD1.1 | length 3.8
  Bottom Layer w0.3: D2.4 -9.25,-6.976 -9.074,-6.8 -6.979,-6.8 -6.725,-6.546 DD1.1
NetDD1_4: DD1.4 VT2.2 | length 9.2
  Bottom Layer w0.35: VT2.2 -5,-4.075 -4.85,-4.225 -4.85,-4.825 DD1.4
NetDD1_6: DD1.6 VT1.5 | length 19.1
  Bottom Layer w0.3: DD1.6 -2.65,-6.15 -1.45,-4.95 2.865,-4.95 4.8,-3.015 4.8,2.979 5.821,4 VT1.5
NetFU1_2: FU1.2 VD1.1 VD1.2 | length 4.5
  Top Layer w0.4: VD1.2 VD1.1 ; VD1.1@2.45,-6.275 FU1.2
NetR3_2: R3.2 VT1.2 VT1.3 | length 1.9
  Bottom Layer w0.3: VT1.3 VT1.2 R3.2
NetR4_1: R4.1 VT2.5 VT2.6 | length 4.5
  Bottom Layer w0.3: R4.1 -5.225,8.475 -5,8.25 VT2.5 VT2.6
NetR5_1: R5.1 VT2.3 VT3.6 | length 12.6
  Bottom Layer w0.2: -1.549,7.525 -0.524,6.5 0.524,6.5 0.7,6.676 0.7,6.7 1,7
  Bottom Layer w0.3: VT2.3 -5.65,5.074 -5.474,5.25 -2.926,5.25 -2.75,5.426 R5.1 -1.549,7.525 ; 1,7 1,9.2 VT3.6
NetR5_2: R5.2 VD3.2 VT3.2 | length 3.9
  Bottom Layer w0.3: VD3.2 -2.825,9.05 R5.2 ; R5.2@-2.725,9 R5.2 ; VT3.2 -2.4,9.9 -2.75,9.55 R5.2
NetR6_1: R6.1 VD4.1 VT3.5 | length 4.4
  Bottom Layer w0.35: VT3.5 1.063,9.913 1.695,9.913 1.9,9.708 1.9,8.48 2.105,8.275 R6.1 2.775,8.25 VD4.1
NetR6_2: R6.2 VT1.6 VT3.3 | length 14.3
  Bottom Layer w0.3: VT3.3 -0.85,10.95 -0.6,11.2 1.85,11.2 2.55,10.5 2.75,10.5 ; R6.2 2.75,10.5 ; VT1.6 6.55,9.7 5.75,10.5 2.75,10.5
NetR7_1: R7.1 VT3.1 VT3.4 | length 5.2
  Bottom Layer w0.4: VT3.1 -0.234,9.25 0,9.484 ; R7.1 0,9.484 ; VT3.4 0.234,10.55 0,10.316 0,9.484
NetT1_4: T1.4 T2.4 VD6.2 | length 14.3
  Top Layer w0.3: VD6.2 -1.95,15.05 -1.537,14.637 T2.4
  Top Layer w0.5: T2.4 -1.497,12.996 -1.497,11.697 -1.087,11.287 6.557,11.287 6.967,11.697 6.967,13.032 T1.4
NetT1_6: T1.6 VD5.3 | length 3.5
  Top Layer w0.3: T1.6 1.883,14.783 2.45,15.35 VD5.3
NetT2_6: T2.6 VD6.1 | length 4.4
  Top Layer w0.3: T2.6@-6.575,13.077 -6.575,14.466 -6.341,14.7 -4.8,14.7 -4.45,15.05 VD6.1
  Top Layer w0.4: T2.6 T2.6@-6.575,13.077
OUT: pad.0@0,0 R7.2 | length 21
  Top Layer w0.5: v1(-3.225,-0.125) pad.0@-0.125,-0.125 ; v1(-3.125,0.775) pad.0@-1.025,0.775 ; v1(-3.1,-1.025) -1.025,-1.025 pad.0@-0.125,-0.125 ; pad.0@-2.075,0 pad.0@-0.25,0 ; pad.0@0,0 pad.0@-0.25,0 ; pad.0@0.175,0.175 -0.425,0.775 pad.0@-1.025,0.775 ; v1(3,0.925) 3,-0.8 v1(3.1,-0.9) ; pad.0@-1.025,0.775 pad.0@-0.25,0 ; pad.0@-0.25,0 pad.0@-0.125,-0.125
  Bottom Layer w0.6: pad.0@0,0 R7.2
  other v1: 3.2,-0.025
PE: C9.2 pad.0@16.5,0 | length 7.5
  Bottom Layer w0.5: C9.2 13.6,-3.4 16.5,-0.5 pad.0@16.5,0
PULSE_NEG: D2.2 NEG.1 R9.2 XP4.3 | length 30.1
  Top Layer w0.2: XP4.3 -11.876,-10.845 -11.7,-10.67 -11.7,-6.41 -11.3,-6.01 -11.3,1.543 -11.7,1.943 -11.7,4.8 -12.9,6 NEG.1
  Bottom Layer w0.3: XP4.3 -11.845,-10.845 -11.75,-10.75 -9.175,-10.75 ; R9.2 -9.175,-11.425 -9.175,-10.75 ; D2.2 -8.6,-10.672 -8.678,-10.75 -9.175,-10.75
PULSE_POS: D1.2 POS.1 R8.2 XP4.5 | length 30.1
  Top Layer w0.3: POS.1 -17.3,4.576 -17.124,4.4 -13.082,4.4 -12.15,3.468 -12.15,1.756 -11.75,1.356 -11.75,-5.8 -12.2,-6.25 -12.2,-9.4 -12.376,-9.575 XP4.5
  Bottom Layer w0.3: XP4.5 -13.45,-9.575 -12.8,-8.925 -12.8,-5.525 R8.2 D1.2
TD: TD.1 XP3.3 | length 14.9
  Bottom Layer w0.3: XP3.3 -13.45,10.845 -13.445,10.85 -11.6,10.85 -10.5,9.75 -10.5,5.525 -7,2.025 TD.1
pads on no net: D1. D1.1 D2. D2.1 DA1.5 DA1.8 DA1.9 DA1.10 T1.5 U1. U1.6 XP1.1 XP1.5 XP2.3 XP2.4 XP3.4 XP3.6 XP4.2 XP4.4 XP4.6

## Polygon pours and split planes (outlines as drawn)
GND on Bottom Layer "GND_L02_P034" (solid, pour order 34): -21,21 21,21 21,-21 -21,-21
-Uп on Bottom Layer "Bottom Layer--Uп" (solid, pour order 33): 11,-21 11,-8.5 0,-8.5 0,-10.5 -7.5,-10.5 -7.5,-21
5V_LMZ on Bottom Layer "BOT Layer-No Net" (solid, pour order 0): 2.65,-13.25 2.65,-16.375 6.1,-16.375 6.1,-13.25
NetC2_1 on Bottom Layer "BOT Layer-No Net" (solid, pour order 2): -6.975,-13.85 -2.375,-13.85 -2.375,-16.975 -6.975,-16.975
no net on Bottom Layer "NONET_L02_P022" (solid, pour order 22): -17.25,10.75
GND on Top Layer "GND_L01_P030" (solid, pour order 30): -22.5,22.5 22.5,22.5 22.5,-22.5 -22.5,-22.5
-Uп on Top Layer "-Uп_L01_P029" (solid, pour order 29): -9.625,-21 -9.625,-5.075 10.875,-5.075 10.875,-21
no net on Top Layer "NONET_L01_P028" (solid, pour order 28): -9.5,-5.25
no net on Top Layer "NONET_L01_P020" (solid, pour order 20): -10.3,14.7
no net on Top Layer "NONET_L01_P008" (solid, pour order 8): 4.5,1.25
no net on Top Layer "NONET_L01_P015" (solid, pour order 15): 4,3

## Keep-outs
Top Layer:
  circle w0.254: c0,0 r4
  circle w0.254: c16.5,0 r3.64
  circle w0.254: c-16.5,0 r3.661
  region: 11.392,-5.075 11.392,-4.875 -10.125,-4.875 -10.125,-5.075
  rectangle: -10.025,-18.375 -9.625,-5.075
  rectangle: 11.019,-9.126 11.436,-4.7
  rectangle: 11,-17.325 11.4,-12.6
  rectangle: 11,-11.7 11.417,-10.1
Bottom Layer:
  circle w0.254: c0,0 r4
  circle w0.254: c16.5,0 r3.64
  circle w0.254: c-16.5,0 r3.661
  rectangle: 10.995,-17.325 11.4,-11.7
  rectangle: 11,-11.7 11.4,-10.066
  rectangle: -0.6,-8.2 5.5,-7.8
  rectangle: -0.6,-10.5 -0.2,-8
  rectangle: -8.075,-10.6 -0.2,-10.3
  rectangle: -8.075,-19.1 -7.675,-10.5

## Other copper
Top Layer:
  region: 14.35,32.65
  region: 14.35,32.65
  region: 14.35,32.65
  region: 14.35,32.65
  region: 14.35,32.65
  region: 14.35,32.65
  region: 14.35,32.65
  region: 14.35,32.65
  region: 14.35,32.65
  region: 14.35,32.65
  region: 14.35,32.65
  region: 14.35,32.65
  region: 14.35,32.65
Bottom Layer:
  region: 7.3,-21.425
  region: 7.3,-21.425
  region: 7.3,-21.425
  region: 7.3,-21.425
  region: 7.3,-21.425
  region: 7.3,-21.425
  region: 7.3,-21.425
  region: 7.3,-21.425
  region: 7.3,-21.425
  region: 7.3,-21.425
  region: 7.3,-21.425
  region: 7.3,-21.425
  region: 7.3,-21.425

## Silkscreen, mask and mechanical layers (free items; w line width, h text height)
Top Overlay:
  lines w0.1: 11.625,-17 10.625,-17 10.625,17 11.625,17 ; 11.65,-17 11.65,17 ; -11.65,-17 -11.65,17 -10.65,17 -10.65,-17 -11.65,-17
Bottom Overlay:
  lines w0.15: -12.225,-3.65 -4.925,-3.65 -4.925,3.7 -12.225,3.7 -12.225,-3.65
Mechanical 1:
  circle w0.5: c1.201,7 r0.15
  circle w0.5: c-7.5,7 r0.15
  circle w0.5: c8,2 r0.15
  circle w0.15: c18,6 r1.253
  circle w0.15: c-14.4,6 r1.253
  circle w0.15: c-17.3,6 r1.253
  lines w0.15: -17,-12.8 -17,-8.9 -13.7,-8.9 -13.7,-12.8 -17,-12.8 ; -17,8.9 -13.7,8.9 -13.7,12.8 -17,12.8 -17,8.9 ; -8.2,6.5 -0.175,6.5 -0.175,11.7 -8.2,11.7 -8.2,6.5 ; 0.4,6.5 0.4,11.7 8.425,11.7 8.425,6.5 0.4,6.5 ; 5.5,-1.5 8.5,-1.5 8.5,2.5 5.5,2.5 5.5,-1.5 ; 13.669,-12.777 13.669,-8.877 16.969,-8.877 16.969,-12.777 13.669,-12.777 ; 13.698,7.552 13.698,11.452 16.998,11.452 16.998,7.552 13.698,7.552
  text "20K" at -0.462,17.8 h0.5 r90
  text "4,7uF" at 1.276,17.796 h0.5 r90
  text "20K" at 7.55,17.4 h0.5 r90
  text "4,7uF" at 5.976,17.296 h0.5 r90
  text "100uF" at -8.231,14.037 h0.5
  text "XP3" at -15.947,10.7 h0.5
  text "XP1" at 14.751,9.352 h0.5
  text "D" at 12,4 h1.5 r270
  text "M" at -12.25,2.85 h1.5 r90
  text "D" at 12,-2.5 h1.5 r270
  text "10uF" at 5.6,-3.8 h0.5
  text "M" at -12.225,-4.175 h1.5 r90
  text "22uH" at -6.7,-8.625 h0.5
  text "4,7uF" at -2.1,-9.633 h0.5
  text "XP2" at 14.722,-10.977 h0.5
  text "XP4" at -15.947,-11 h0.5
  text "47uF" at -4,-16 h0.5
  text "плп-cbot_2a" at -4,-19.8 h1.5
Mechanical 2:
  circle w0.35: c-11.2,-6.086 r0.1
  circle w0.4: c-8,-9.7 r0.1
  circle w0.4: c8,2 r0.15
  lines w0.15: 3.5,9.382 4.5,9.382 ; -11.8,-6.55 -8.6,-6.55 -8.6,-4.43 -11.763,-4.43 -11.8,-6.55 ; -9.7,-10.2 -9.7,-7 -7.5,-7 -7.5,-10.2 -9.7,-10.2 ; -5.45,-18.675 -5.45,-14.9 -2.8,-14.9 -2.8,-18.675 -5.45,-18.675 ; 3.5,7.831 3.5,10 4.5,10 4.5,7.831 3.5,7.831 ; 5.51,-1.5 5.51,2.502 8.5,2.5 8.5,-1.5 5.51,-1.5
  text "R14" at 0.729,15.582 h0.5
  text "1K" at 0.476,14.681 h0.5
  text "1K" at -8.59,10.063 h0.5
  text "R2" at -8.232,9.864 h0.5 r270
  text "VT3" at -0.199,9.341 h0.5 r270
  text "1K" at 2.125,8.738 h0.5
  text "R6" at 2.492,8.561 h0.5 r270
  text "VD4" at 3.724,7.943 h0.5 r270
  text "1K" at -3.346,7.913 h0.5
  text "R5" at -2.973,7.831 h0.5 r270
  text "1K" at -7.49,7.595 h0.5
  text "R4" at -6.973,7.431 h0.5 r270
  text "1uF" at 10.287,7.211 h0.5
  text "1K" at 11.633,7.232 h0.5
  text "100" at -0.675,6.29 h0.5
  text "R7" at -0.269,6.098 h0.5 r270
  text "R1" at 11,5.666 h0.5 r270
  text "C10" at 9.473,5.364 h0.5 r270
  text "R10" at -12.342,5.173 h0.5 r270
  text "VT2" at -4.325,5.173 h0.5
  text "1uF" at -7.39,4.995 h0.5
  text "C11" at -6.997,4.841 h0.5 r270
  text "100" at -11.4,4.1 h0.5
  text "R3" at 10.764,3.771 h0.5
  text "VT1" at 7.252,3.26 h0.5 r270
  text "1K" at 10.821,2.783 h0.5
  text "U1" at 7.349,0.261 h0.5
  text "D1" at -9.756,-5.664 h0.5
  text "R8" at -12.99,-5.774 h0.5
  text "DD1" at -5.945,-5.986 h0.5 r270
  text "C9" at 11.997,-6.435 h0.5
  text "10K" at -12.904,-6.731 h0.5
  text "0.001uF" at 13.1,-8.7 h0.5
  text "D2" at -8.218,-8.848 h0.5
  text "10K" at -9.974,-12.524 h0.5
  text "R9" at -9.472,-12.579 h0.5 r270
  text "DA1" at 0.59,-14.996 h0.5
  text "C4" at 5.044,-16.615 h0.5
  text "C3" at -3.706,-17.026 h0.5
  text "10uF" at -3.315,-19.555 h0.5
Mechanical 3:
  circle w0.15: c-16.5,0 r2
  circle w0.15: c16.5,0 r2
  circle w0.15: c0,0 r2.25
  lines w0.1: -11.4,-17 -10.4,-17 -10.4,17 -11.4,17 -11.4,-17 ; -10.25,-14 10.25,-14 10.25,14 -10.25,14 -10.25,-14 ; 10.375,-17 10.375,17 11.375,17 11.375,-17 10.375,-17
Mechanical 4:
  lines w0.15: -18.884,-9.187 ccw(c0,0) 18.884,-9.186 ; -18.871,-9.18 ccw(c-19.659,-6.984) -20.447,-4.788 cw(c0,0) -15.214,14.475 ccw(c-13.932,15.619) -12.649,16.762 ; -12.65,16.763 cw(c0,0) 12.65,16.763 ccw(c13.932,15.619) 15.204,14.464 ; 15.215,14.474 cw(c0,0) 20.447,-4.788 ccw(c19.659,-6.984) 18.878,-9.183